# EAGLE board avr_controller (EAGLE 4.16)
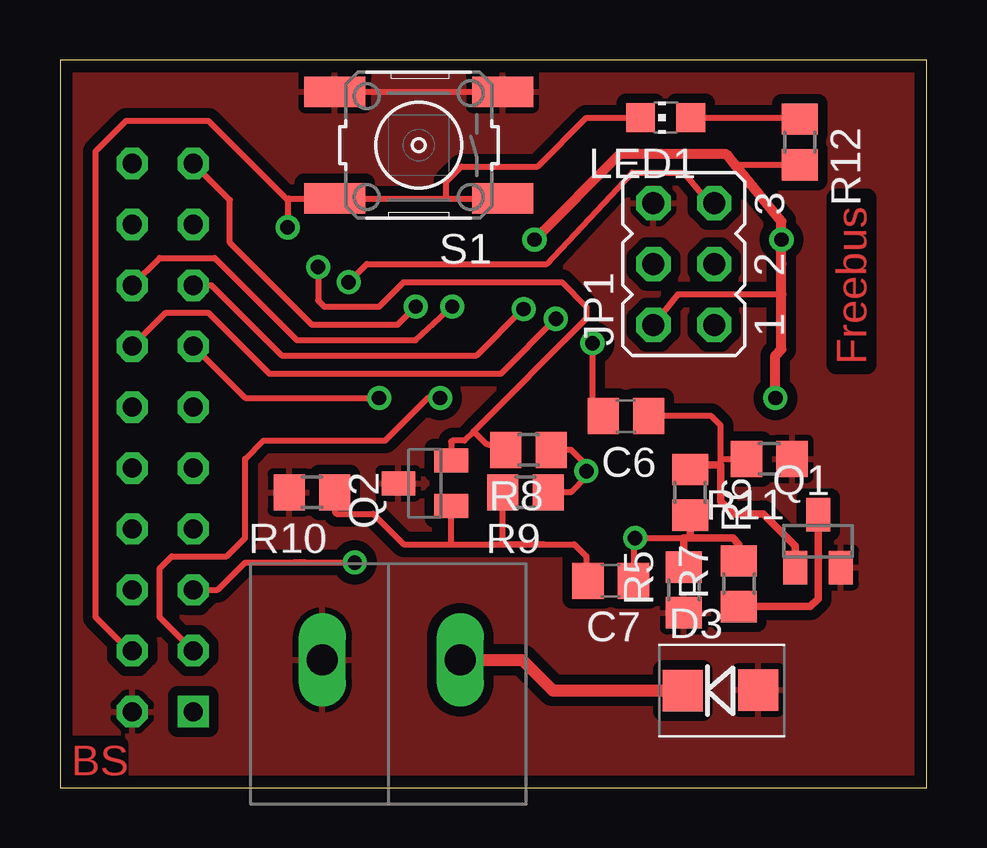
[diagram p0: board, top side]
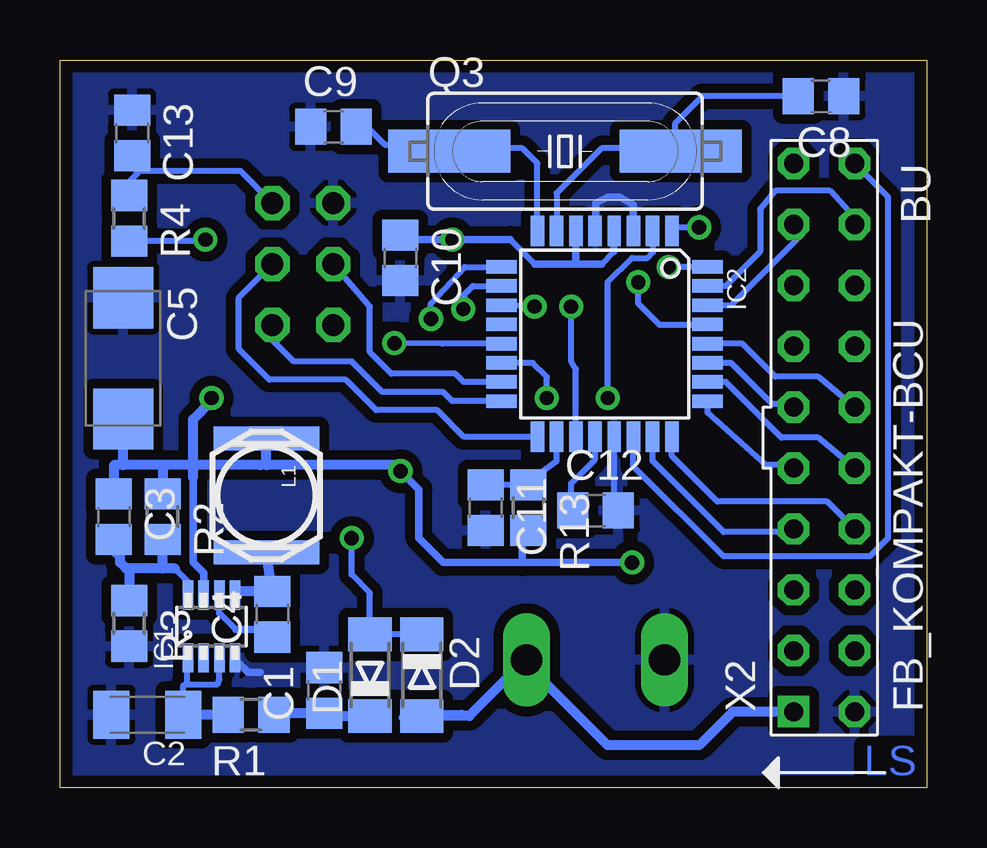
[diagram p1: board, bottom side, seen from below]

Size 36.12 x 30.34 mm. Coordinates in mm from the lower left corner, seen from the top.
Outline: 0,0 36.12,0 36.12,30.34 0,30.34 0,0
Copper layers (1*16): Top 0.035mm / dielectric 1.5mm / Bottom 0.035mm
Design rules "default": minimum track width 10mil, minimum drill 10mil, track to track 12mil, track to pad 10mil, pad to pad 8mil, via to via 8mil, smd to smd 8mil, copper to edge 20mil, drill to drill 8mil, minimum pad ring 10mil, minimum via ring 8mil, stop-mask expansion 4mil, vias tented up to drill 0mil, thermal gap 10mil

## Footprints (pad centres in the part's own frame; a part is rotated, then mirrored left to right if it is on the bottom)
C0805 = smd 1.3 x 1.5: 1 -0.95,0; 2 0.95,0
C1206K = smd 1.5 x 2: 1 -1.5,0; 2 1.5,0
C/6032-28R = smd 2.55 x 2.5: + 2.525,0; - -2.525,0
MINIMELF = smd 1.4 x 1.8: A 1.7,0; C -1.7,0
SMA = smd 1.67 x 1.73: 1 -1.576,0; 2 1.58,0.014
TSOT23-8 = smd 0.44 x 1.22: 1 -0.975,-1.31; 2 -0.325,-1.31; 3 0.325,-1.31; 4 0.975,-1.31; 5 0.975,1.31; 6 0.325,1.31; 7 -0.325,1.31; 8 -0.975,1.31
TQFP32-08 = smd 1.27 x 0.559: 1 -4.293,2.8; 2 -4.293,2; 3 -4.293,1.2; 4 -4.293,0.4; 5 -4.293,-0.4; 6 -4.293,-1.2; 7 -4.293,-2; 8 -4.293,-2.8; 17 4.293,-2.8; 18 4.293,-2; 19 4.293,-1.2; 20 4.293,-0.4; 21 4.293,0.4; 22 4.293,1.2; 23 4.293,2; 24 4.293,2.8 | smd 0.559 x 1.27: 9 -2.8,-4.293; 10 -2,-4.293; 11 -1.2,-4.293; 12 -0.4,-4.293; 13 0.4,-4.293; 14 1.2,-4.293; 15 2,-4.293; 16 2.8,-4.293; 25 2.8,4.293; 26 2,4.293; 27 1.2,4.293; 28 0.4,4.293; 29 -0.4,4.293; 30 -1.2,4.293; 31 -2,4.293; 32 -2.8,4.293
JP3Q = drill 0.914 octagon: 1 -2.54,-1.27; 2 -2.54,1.27; 3 0,-1.27; 4 0,1.27; 5 2.54,-1.27; 6 2.54,1.27
DS1605 = smd 1 x 4.4: P$1 -2.38,0; P$2 2.38,0
CHIP-LED0805 = smd 1.2 x 1.2: A 0,-1.05; C 0,1.05
SOT23 = smd 1 x 1.4: 1 -0.95,-1.1; 2 0.95,-1.1; 3 0,1.1
SOT23-BEC = smd 1 x 1.4: B -0.95,-1.1; C 0,1.1; E 0.95,-1.1
SM49 = smd 5.08 x 1.778: 1 -4.826,0; 2 4.826,0
R0805 = smd 1.3 x 1.5: 1 -0.95,0; 2 0.95,0
SMS1600 = smd 2.54 x 1.27: 1 -3.493,2.223; 2 3.493,2.223; 3 -3.493,-2.223; 4 3.493,-2.223
BUSKLEMME243-724 = drill 1.3 long: 1 -2.875,0; 2 2.875,0
EIB_10X2_BUCHSE = drill 0.8 square: EIB1 0,0 | drill 0.8 octagon: EIB2 0,-2.54; EIB3 -2.54,0; EIB4 -2.54,-2.54; EIB5 -5.08,0; EIB6 -5.08,-2.54; EIB7 -7.62,0; EIB8 -7.62,-2.54; EIB9 -10.16,0; EIB10 -10.16,-2.54; EIB11 -12.7,0; EIB12 -12.7,-2.54; EIB13 -15.24,0; EIB14 -15.24,-2.54; EIB15 -17.78,0; EIB16 -17.78,-2.54; EIB17 -20.32,0; EIB18 -20.32,-2.54; EIB19 -22.86,0; EIB20 -22.86,-2.54

## Placement (x,y rotation side)
C1  100nF  [C0805]  25.11,4.06 90 bottom
C2  2.2µF  [C1206K]  32.47,3.04 180 bottom
C3  22pF  [C0805]  33.87,11.3 270 bottom
C4  220nF  [C0805]  27.27,7.23 90 bottom
C5  22µF / Low ESR  [C/6032-28R]  33.49,17.9 270 bottom
C6  100nF  [C0805]  23.58,15.49 180 top
C7  100nF  [C0805]  22.95,8.63 180 top
C8  33pF  [C0805]  4.41,28.82 180 bottom
C9  33pF  [C0805]  24.73,27.55 0 bottom
C10  100nF  [C0805]  21.93,22.09 270 bottom
C11  100nF  [C0805]  18.38,11.68 270 bottom
C12  100nF  [C0805]  13.81,11.55 0 bottom
C13  47nF  [C0805]  33.11,27.3 270 bottom
D1  LL4148  [MINIMELF]  23.2,4.69 90 bottom
D2  LL4148  [MINIMELF]  21.04,4.69 270 bottom
D3  SMAJ43CA  [SMA]  27.52,4.06 0 top
IC1  LT3470ES8  [TSOT23-8]  29.81,6.73 0 bottom
IC2  MEGA8-AI  [TQFP32-08]  13.42,18.92 270 bottom
JP1  [JP3Q]  26,21.84 90 top
L1  33µ  [DS1605]  27.52,12.19 270 bottom
LED1  [CHIP-LED0805]  25.23,27.94 90 top
Q1  2N7002  [SOT23]  31.59,10.28 0 top
Q2  BC857  [SOT23-BEC]  15.2,12.69 90 top
Q3  [SM49]  15.08,26.54 0 bottom
R1  1  [R0805]  28.16,3.04 180 bottom
R2  324K  [R0805]  31.84,11.3 270 bottom
R3  200K  [R0805]  33.24,6.85 270 bottom
R4  10K  [R0805]  33.24,23.74 270 bottom
R5  100K  [R0805]  26,8.25 90 top
R6  390K  [R0805]  26.25,12.31 270 top
R7  68  [R0805]  28.28,8.5 90 top
R8  10K  [R0805]  19.52,14.09 180 top
R9  82K  [R0805]  19.39,12.31 180 top
R10  47K  [R0805]  10.5,12.31 180 top
R11  12K  [R0805]  29.55,13.71 180 top
R12  560  [R0805]  30.82,26.92 270 top
R13  10µH  [R0805]  16.6,11.68 270 bottom
S1  [SMS1600]  14.95,26.79 180 top
U$1  EIB  [BUSKLEMME243-724]  13.81,5.33 0 top
X2  FB_KOMPAKT-BCU  [EIB_10X2_BUCHSE]  5.55,3.17 270 top

## Library data of the parts
C1-C13 R1-R13 = rcl
D1 D2 = diode-os
D3 IC1 L1 S1 U$1 = own
IC2 = atmel
JP1 = jumper
LED1 = led
Q1 = transistors_gaui
Q2 = transistor-pnp
Q3 = crystal
X2 = EIB_Freebus

## Nets
CRTL: IC2.14 X2.EIB3
GND: C1.2 C2.2 C5.- C8.1 C9.1 C10.2 C11.2 C12.2 C13.1 D3.2 IC1.4 IC2.3 IC2.5 IC2.21 JP1.6 Q1.2 Q2.C R3.2 R5.1 R10.2 R11.1 S1.3 S1.4 U$1.1 X2.EIB2
IO1: IC2.23 X2.EIB7
IO2: IC2.24 X2.EIB8
IO3: IC2.25 X2.EIB9
IO4: IC2.26 X2.EIB10
IO5: IC2.2 X2.EIB13
IO6: IC2.9 X2.EIB14
IO7: IC2.10 X2.EIB15
IO8: IC2.11 X2.EIB16
N$1: C3.2 IC1.8 R2.2 R3.1
N$3: C8.2 IC2.7 Q3.2
N$4: C2.1 IC1.1 IC1.3 R1.2
N$5: C7.2 Q2.B R9.2 R10.1
N$6: C9.2 IC2.8 Q3.1
N$7: C4.2 IC1.5 L1.P$2
N$8: C4.1 IC1.6
N$9: Q1.3 R7.1
N$10: C1.1 D1.C R1.1
N$11: C6.1 Q1.1 R6.1 R11.2
N$12: C7.1 D1.A D2.C R5.2 R6.2 R7.2
N$13: IC2.32 Q2.E R8.2
N$14: D2.A D3.1 U$1.2 X2.EIB1
N$15: C13.2 IC2.29 JP1.5 R4.1
N$16: C6.2 IC2.13
N$17: IC2.15 JP1.4
N$18: C11.1 IC2.18 R13.1
N$19: C12.1 IC2.20
N$20: IC2.16 JP1.1
N$21: IC2.17 JP1.3
N$22: LED1.A R12.1
PROG: IC2.1 LED1.C S1.1 S1.2 X2.EIB4
RES3: IC2.19 X2.EIB19
RES4: IC2.22 X2.EIB20
RX: IC2.30 X2.EIB17
SCL: IC2.28 X2.EIB12
SDA: IC2.27 X2.EIB11
TX: IC2.31 X2.EIB18
VCC: C3.1 C5.+ C10.1 IC1.7 IC2.4 IC2.6 JP1.2 L1.P$1 R2.1 R4.2 R8.1 R9.1 R12.2 R13.2 X2.EIB5

## Tracks (layer width: path | path; a pad name or v marks a point on that pad's centre or on a via)
CRTL  (via drill 0.6)
  Top 0.254: v15.84,16.25 15.33,16.25 13.55,14.47 8.47,14.47 7.71,13.71 7.71,10.41 6.95,9.65 4.66,9.65 4.15,9.14 4.15,7.11 X2.EIB3
  Bottom 0.254: IC2.14 16.41,17.72 15.84,17.14 v15.84,16.25
GND
  Top 0.254: S1.3 18.31,29.02 18.25,29.08 18.19,29.02 S1.4
  Bottom 0.254: C12.2 12.92,11.55 13.04,11.68 13.02,11.7 IC2.21
  Bottom 0.305: IC1.4 28.83,5.37 28.28,4.82 27.78,4.82 | IC2.3 12.22,24.32 12.79,24.63 13.3,24.63 13.81,24.38 13.81,23.36 13.82,23.34 IC2.5 | C11.2 18.38,10.92
  pour Bottom (isolate 0.406): 0.34,29.97 35.65,29.97 35.65,0.25 0.34,0.25
  pour Top (isolate 0.406): 0.34,29.97 35.65,29.97 35.65,0.25 0.34,0.25
IO1
  Bottom 0.254: IC2.23 11.42,13.62 8.47,10.66 5.68,10.66 X2.EIB7
IO2
  Bottom 0.254: IC2.24 10.62,13.83 8.73,11.93 4.15,11.93 X2.EIB8
IO3
  Bottom 0.254: IC2.25 9.13,15.64 6.69,13.46 5.68,13.46 X2.EIB9
IO4
  Bottom 0.254: IC2.26 8.38,16.92 6.06,14.6 4.53,14.6 X2.EIB10
IO5  (via drill 0.6)
  Top 0.254: 5.68,18.28 X2.EIB13 7.71,16.25 v13.3,16.25
  Bottom 0.254: v13.3,16.25 13.3,21.08 12.28,22.09 11.65,22.09 11.39,22.35 11.39,23.24 IC2.2 11.42,23.2
IO6  (via drill 0.6)
  Top 0.254: X2.EIB14 4.41,19.81 6.18,19.81 8.73,17.27 18.38,17.27 v20.66,19.55
  Bottom 0.254: IC2.9 19.26,21.72 20.66,20.19 v20.66,19.55
IO7  (via drill 0.6)
  Top 0.254: X2.EIB15 6.31,20.95 9.23,18.03 17.36,18.03 19.29,19.96 v19.32,19.96 19.32,19.88 19.39,19.81
  Bottom 0.254: 19.32,20.37 19.39,20.44 18.92,20.92 IC2.10
  Bottom 0.406: v19.32,19.96 19.32,20.37
IO8  (via drill 0.6)
  Top 0.254: X2.EIB16 4.15,22.09 6.44,22.09 9.87,18.66 14.82,18.66 v16.35,20.06
  Bottom 0.254: v16.35,20.06 IC2.11
N$1
  Bottom 0.254: IC1.8 30.78,8.59 31.33,9.14
  Bottom 0.406: 31.33,9.14 31.84,9.14 | 31.84,9.14 R2.2 | R3.1 33.24,9.01 33.11,9.14 | 31.84,9.14 33.11,9.14 | 33.11,9.14 33.36,9.14 33.62,9.39 33.62,9.65 33.87,9.9 C3.2
N$3
  Bottom 0.254: IC2.7 15.42,24.79 13.55,26.67 10.5,26.67 | 10.5,26.67 10.25,26.41 Q3.2 10.38,26.54 10.5,26.67 | C8.2 9.36,28.82 10.5,27.68 10.5,26.67
N$4
  Bottom 0.254: IC1.3 29.48,4.51 29.55,4.31 30.82,4.31 | IC1.1 30.82,5.46 30.82,4.31 | C2.1 30.97,4.29 30.82,4.31
  Bottom 0.406: R1.2 C2.1
N$5
  Top 0.254: 16.35,10.15 14.31,10.15 13.04,11.42 11.52,11.42 11.45,11.49 R10.1 | 16.35,10.15 20.16,10.15 | Q2.B 16.3,10.2 16.35,10.15 | 20.16,10.15 18.38,10.15 18.44,10.22 R9.2 | 20.16,10.15 21.43,10.15 21.93,9.65 21.93,8.63 C7.2
N$6
  Bottom 0.254: IC2.8 16.22,26.04 16.85,26.67 19.65,26.67 | 19.65,26.67 19.9,26.67 | 19.65,26.67 19.77,26.54 Q3.1 19.9,26.67 | C9.2 23.33,27.55 22.57,26.79 20.03,26.79 19.9,26.67
N$7
  Bottom 0.254: IC1.5 28.83,8.08 28.73,8.18
  Bottom 0.406: 28.73,8.18 C4.2 L1.P$2
N$8
  Bottom 0.254: IC1.6 29.48,7.23 29.43,7.23 28.79,6.6
  Bottom 0.305: IC1.6 | C4.1 27.27,6.34 27.52,6.6 28.79,6.6
N$9
  Top 0.305: R7.1 31.27,7.55 31.59,7.87 Q1.3
N$10
  Bottom 0.254: C1.1 25.42,3.11 25.49,3.04 25.44,2.99 | R1.1 27.52,3.04 27.46,3.11
  Bottom 0.406: 25.44,2.99 D1.C | C1.1 27.46,3.11
N$11
  Top 0.254: 27.52,13.46 27.52,13.71 | 27.52,13.71 27.52,15.11 27.14,15.49 C6.1 | 27.52,13.71 R11.2
  Top 0.305: 26.25,13.46 26.31,13.52 | 26.25,13.46 R6.1 | 26.25,13.46 27.52,13.46 27.52,11.93 28.03,11.42 29.3,11.42 30.64,10.09 Q1.1
N$12  (via drill 0.6)
  Top 0.254: 26,10.41 v23.96,10.41 23.9,10.34 C7.1
  Top 0.305: 26.25,10.41 26,10.41 R5.2 | 26.25,10.41 28.03,10.41 28.28,10.15 R7.2 28.28,9.39 | 26.25,10.41 R6.2
  Bottom 0.254: D2.C 21.73,6.39 | 21.73,6.39 D1.A 23.2,8.12 23.96,8.88 v23.96,10.41 | 21.73,6.39 21.68,6.34
N$13  (via drill 0.6)
  Top 0.254: v10.76,21.71 10.76,20.32 11.01,20.06 13.3,20.06 14.31,21.08 20.92,21.08 21.93,20.06 21.93,19.55 17.23,14.85 | Q2.E 16.3,14.43 16.35,14.47 16.85,14.47 17.23,14.85 | R8.2 17.74,14.35 17.23,14.85
  Bottom 0.254: 9.23,21.84 9.11,21.72 | 9.13,21.69 9.11,21.71 v10.76,21.71
  Bottom 0.305: 9.23,21.84 9.13,21.69 IC2.32
N$14
  Top 0.508: D3.1 20.54,4.06 19.27,5.33 U$1.2
  Bottom 0.406: 19.39,3.04 21.43,3.04 21.68,2.79 21.81,2.92 D2.A 19.06,2.99 16.73,5.33 U$1.2 16.68,5.25 16.73,5.2 13.3,1.77 9.49,1.77 8.09,3.17 X2.EIB1
N$15  (via drill 0.6)
  Top 0.254: JP1.5 27.27,24.12 26,25.65 23.84,25.65 20.28,21.84 12.79,21.84 v12.03,21.08
  Bottom 0.254: JP1.5 28.6,25.71 32.79,25.71 | R4.1 33.24,25.01 33.36,25.14 32.79,25.71 | C13.2 33.11,25.9 32.92,25.71 32.79,25.71 | 9.23,19.3 9.21,19.32 IC2.29 | 9.23,19.3 9.25,19.32 | 9.23,19.3 11.14,19.3 12.03,20.19 v12.03,21.08
N$16  (via drill 0.6)
  Top 0.254: v22.19,18.54 22.19,15.23 22.44,15.23 22.7,15.49 C6.2
  Bottom 0.254: v22.19,18.54 20.17,18.52 IC2.13
N$17
  Bottom 0.254: JP1.4 23.2,20.06 23.2,18.16 22.31,17.27 19.65,17.27 19.3,16.92 IC2.15
N$18
  Bottom 0.254: IC2.18 15.42,13.62 16.8,12.62 C11.1
  Bottom 0.305: R13.1 16.79,12.63 16.8,12.62
N$19
  Bottom 0.254: IC2.20 13.82,13.69 14.82,12.69 14.82,11.68 14.76,11.61 C12.1
N$20
  Bottom 0.254: IC2.16 19.77,16.12 20.16,16.51 22.7,16.51 23.96,17.78 26.38,17.78 27.27,18.66 JP1.1
N$21
  Bottom 0.254: IC2.17 19.29,14.62 20.41,15.74 22.95,15.74 24.22,17.01 27.39,17.01 28.66,18.28 28.66,20.44 JP1.3
N$22
  Top 0.254: R12.1 30.82,27.94 30.7,28.06 30.57,27.94 LED1.A
PROG  (via drill 0.6)
  Top 0.254: 9.49,24.51 v9.49,23.36 | 9.49,24.51 9.55,24.57 S1.2 16.09,24.57 | 18.95,24.57 S1.1 | 16.09,24.57 18.95,24.57 | 18.95,24.57 19.14,24.76 | 9.49,24.51 6.18,27.81 2.76,27.81 1.49,26.54 1.49,7.11 3.01,5.58 X2.EIB4 | LED1.C 21.93,27.94 19.9,25.9 16.73,25.9 16.09,25.27 16.09,24.57
  Bottom 0.254: 10.62,23.24 10.5,23.36 v9.49,23.36
  Bottom 0.305: 10.62,23.24 IC2.1
RES3  (via drill 0.6)
  Top 0.254: v14.82,20.06 14.06,19.3 10.5,19.3 7.07,22.73 7.07,24.51 X2.EIB19 5.42,26.16
  Bottom 0.254: IC2.19 14.62,17.46 14.82,17.78 v14.82,20.06
RES4
  Bottom 0.254: X2.EIB20 1.61,24.63 1.61,10.41 2.38,9.65 8.47,9.65 12.22,13.4 IC2.22
RX
  Bottom 0.254: X2.EIB17 5.55,23.24 5.42,22.86 8.16,20.12 IC2.30
SCL
  Bottom 0.254: IC2.28 7.69,18.52 6.31,17.14 4.53,17.14 X2.EIB12
SDA
  Bottom 0.254: IC2.27 8.16,17.72 6.44,16 5.93,16 5.68,15.74 X2.EIB11
TX
  Bottom 0.254: X2.EIB18 2.88,23.62 4.03,24.89 6.31,24.89 6.95,24.12 6.95,22.35 8.38,20.92 IC2.31
VCC  (via drill 0.6)
  Top 0.254: JP1.2 25.74,20.57 30.06,20.57 | 10.25,9.39 9.74,9.39 | 10.25,9.39 v12.28,9.39 | R8.1 21.3,14.09 21.93,13.46 v21.93,13.2 21.93,12.95 21.3,12.31 R9.1 | 30.06,21.84 30.13,21.91 | 28.17,25.92 28.16,25.9 | 28.18,25.92 28.17,25.92 | R12.2 28.22,25.97 28.17,25.92 | X2.EIB5 6.57,8.25 7.71,9.39 10.25,9.39
  Top 0.406: v19.77,22.86 23.33,26.41 27.78,26.41 28.18,25.92 30.06,23.62 v30.06,22.86 30.06,21.84 30.06,20.57 30.06,18.28 29.81,18.03 v29.81,16.25
  Bottom 0.254: 13.04,23.36 13.02,23.34 IC2.4 | 16.85,10.92 R13.2 | 17.36,22.86 16.35,21.84 | 21.17,22.86 C10.1 | 27.52,13.46 27.78,13.46 | v21.93,13.2 22.19,13.46 | v30.06,22.86 30.32,22.86 30.38,22.79 R4.2 | 13.55,21.84 13.04,22.35 | 14.57,21.84 14.62,21.9 | 29.81,16.12 v29.81,16.25
  Bottom 0.305: IC1.7 30.13,8.96 30.57,9.39 30.57,12.95 30.57,13.46 | 16.85,9.39 16.85,10.92 | 17.36,22.86 v19.77,22.86 21.17,22.86 | v21.93,13.2 21.17,12.44 21.17,10.41 20.16,9.39 16.85,9.39 | v12.28,9.39 16.85,9.39 | 13.04,22.35 13.04,23.36 | 16.35,21.84 14.57,21.84 13.55,21.84 | 14.62,21.9 IC2.6
  Bottom 0.406: C3.1 33.87,13.46 33.49,13.46 | 31.84,13.46 33.49,13.46 | 31.84,13.46 R2.1 | 27.78,13.46 30.57,13.46 31.84,13.46 | 22.19,13.46 27.52,13.46 L1.P$1 | 30.57,12.95 30.57,15.36 29.81,16.12 | 33.49,13.46 C5.+

## Text on the board
Top: Freebus | BS
Bottom: LS